# EAGLE board aleph-int130808 (EAGLE 6.4)
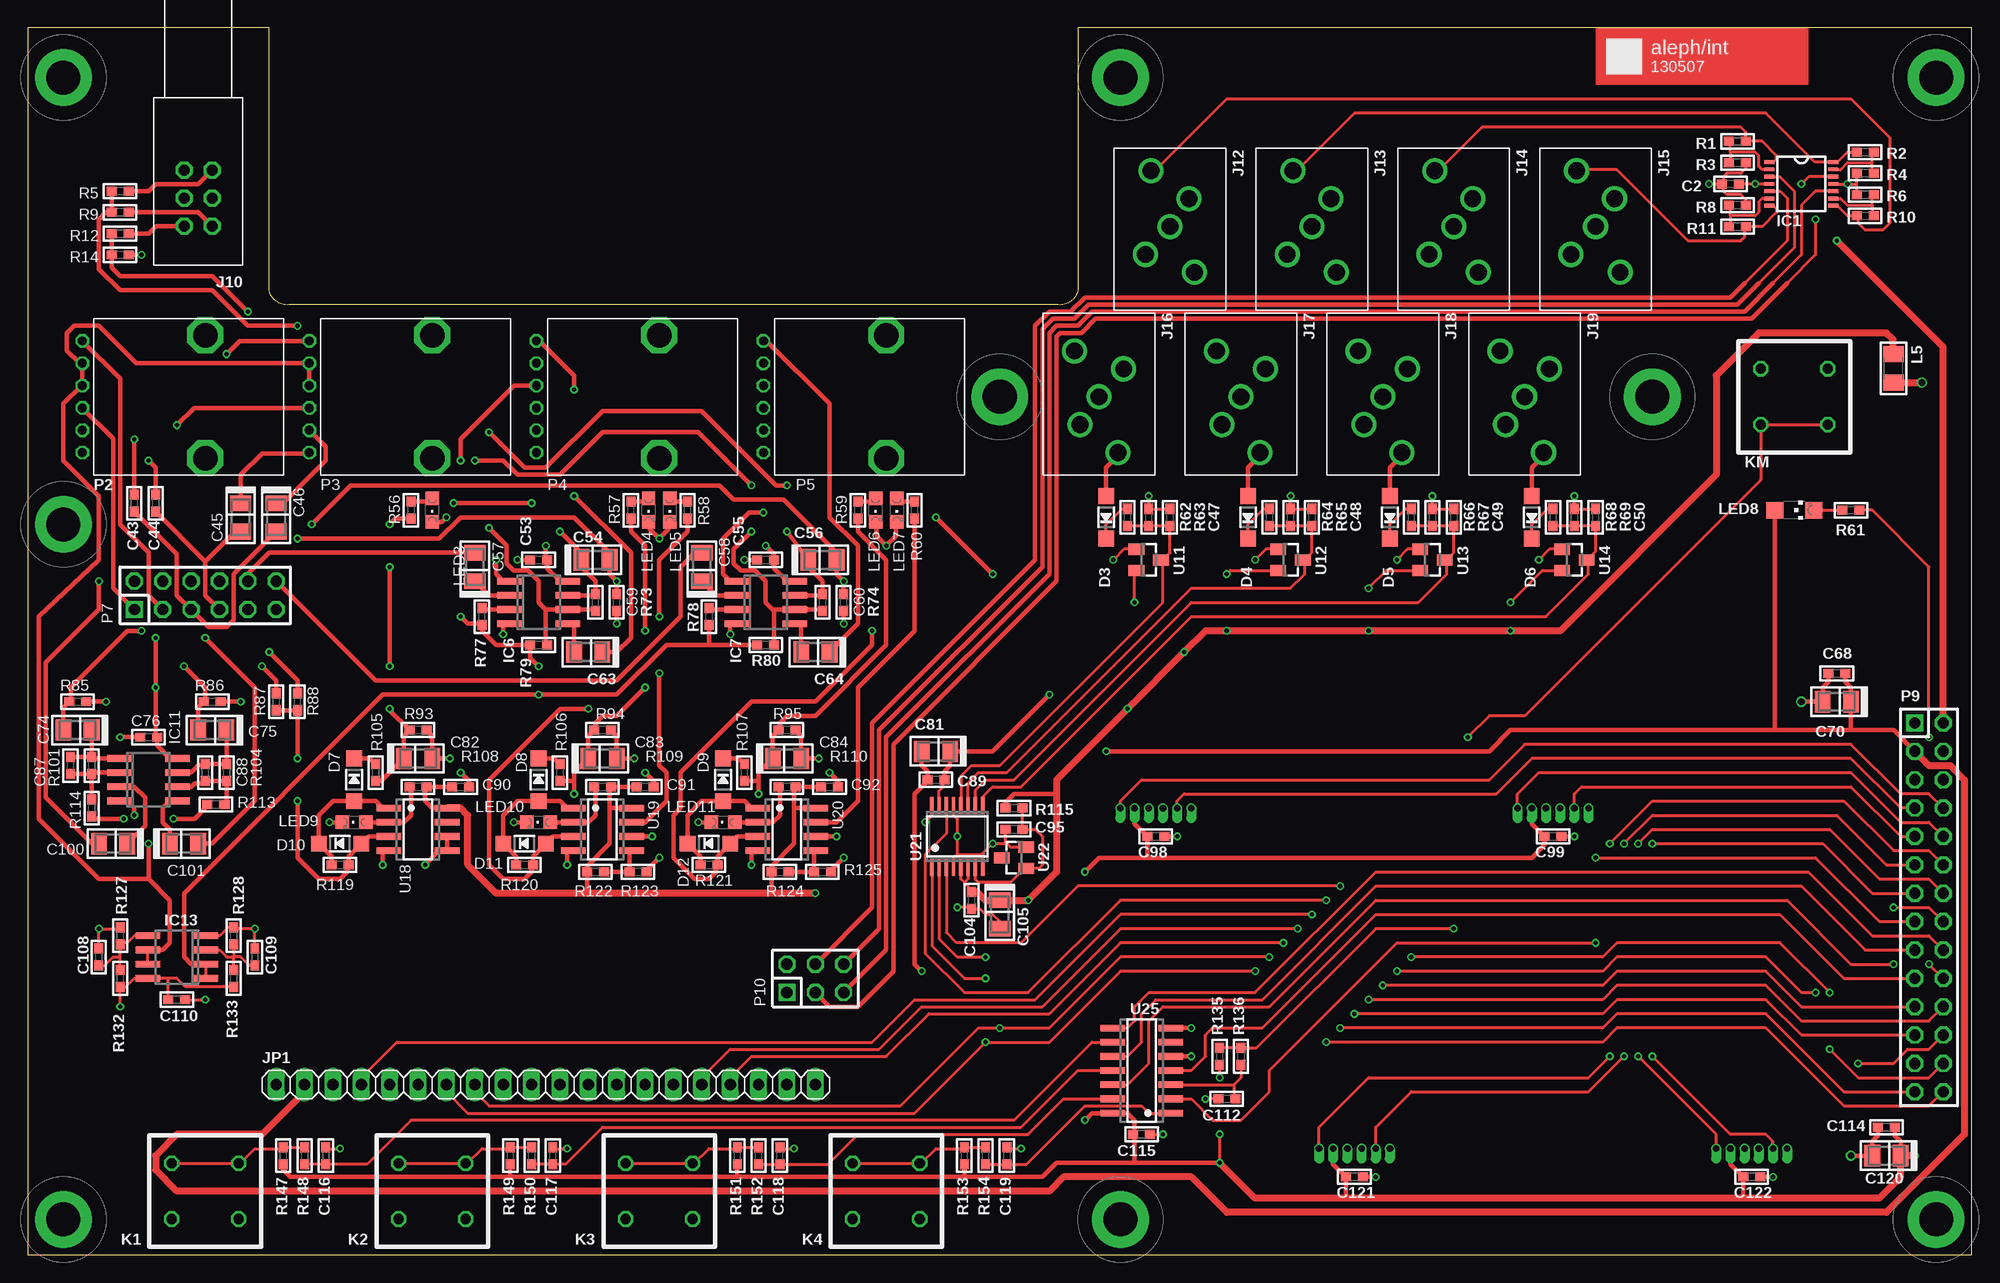
[diagram p0: board, top side]
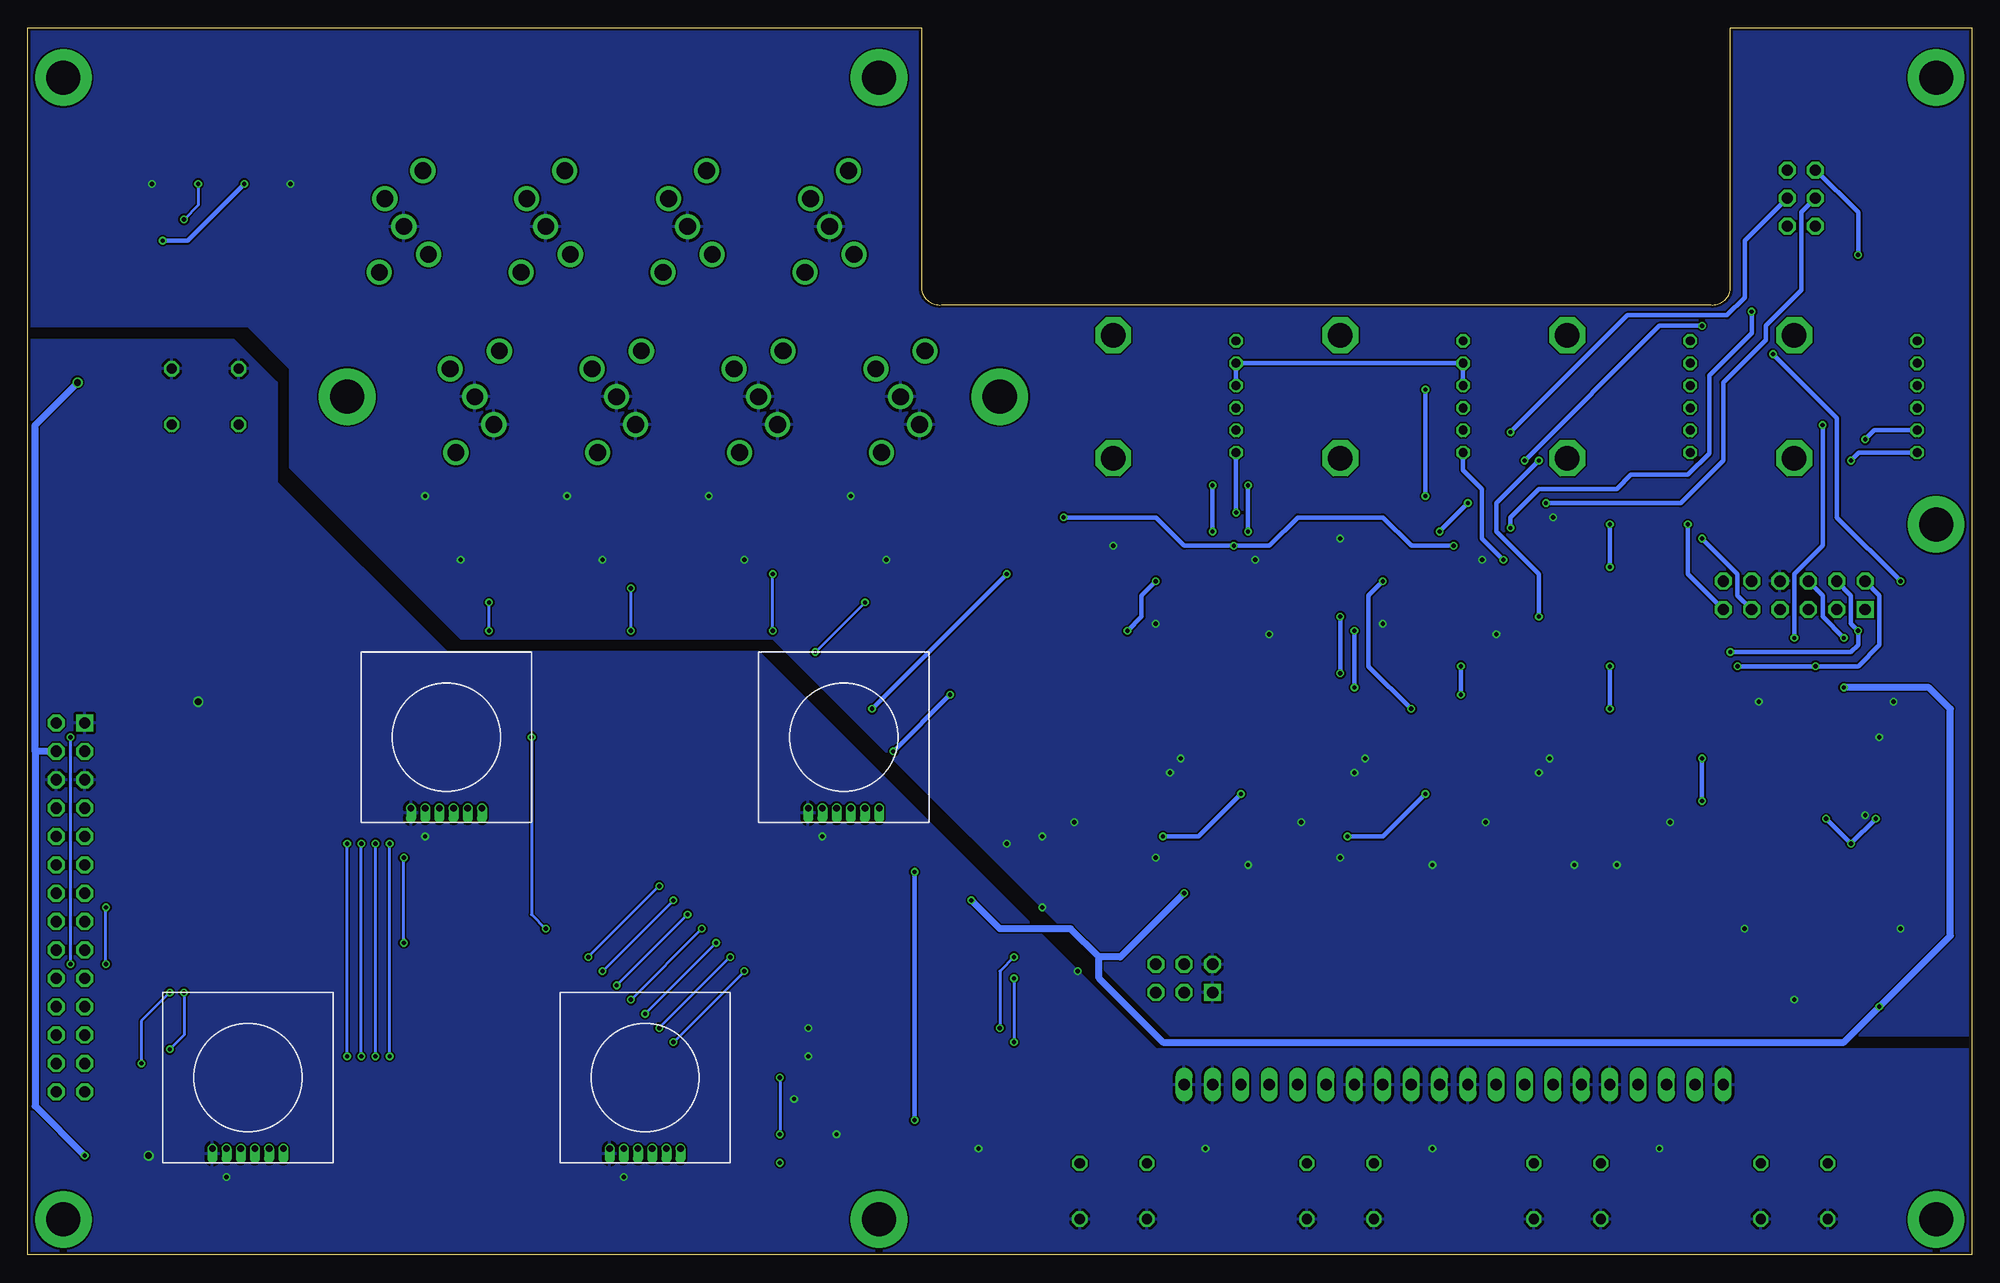
[diagram p1: board, bottom side, seen from below]

Size 173.99 x 109.86 mm. Coordinates in mm from the lower left corner, seen from the top.
Outline: 0,0 173.99,0 173.99,109.86 93.98,109.86 93.98,86.36 arc-90 92.08,85.09 23.5,85.09 arc-90 21.59,86.36 21.59,109.86 0,109.86 0,0
Copper layers (1*2+3*16): Top 0.035mm / dielectric 1.5mm / power 0.035mm / dielectric 0.15mm / gnd 0.035mm / dielectric 0.2mm / Bottom 0.035mm
Design rules "default *": minimum track width 6mil, minimum drill 15mil, track to track 6mil, track to pad 6mil, pad to pad 6mil, via to via 6mil, smd to smd 6mil, copper to edge 10mil, drill to drill 8mil, minimum pad ring 6mil, minimum via ring 6mil, stop-mask expansion 4mil, vias tented up to drill 0mil, thermal gap 10mil

## Footprints (pad centres in the part's own frame; a part is rotated, then mirrored left to right if it is on the bottom)
C0603 = smd 0.9 x 0.8: 1 -0.762,0; 2 0.762,0
C1206/T = smd 1.4 x 1.9: + 1.27,0; - -1.27,0
SOD123 = smd 1.4 x 1.4: A 1.905,0; C -1.905,0
BOURNS-EM14 = drill 0.6 pad 0.813 offset: P$1 -3.175,-6.35; P$2 -1.905,-6.35; P$3 -0.635,-6.35; P$4 0.635,-6.35; P$5 1.905,-6.35; P$6 3.175,-6.35
120-PAD-NS = drill 3.048 pad 5.08: B120 0,0
TSSOP14 = smd 0.9 x 0.35: 1 -2.875,1.95; 2 -2.875,1.3; 3 -2.875,0.65; 4 -2.875,0; 5 -2.875,-0.65; 6 -2.875,-1.3; 7 -2.875,-1.95; 8 2.875,-1.95; 9 2.875,-1.3; 10 2.875,-0.65; 11 2.875,0; 12 2.875,0.65; 13 2.875,1.3; 14 2.875,1.95
SO8 = smd 0.6 x 2.2: 1 -1.905,-2.6; 2 -0.635,-2.6; 3 0.635,-2.6; 4 1.905,-2.6; 5 1.905,2.6; 6 0.635,2.6; 7 -0.635,2.6; 8 -1.905,2.6
PHA2U = drill 1 octagon: 0 -1.25,0; 1 -1.25,-2.5; 2 -1.25,2.5; _0 1.25,0; _1 1.25,-2.5; _2 1.25,2.5
STX-3680 = drill 1.5: 1 2.2,-4.1; 2 -2.2,-2.5; 3 1.7,2.5; 4 -1.7,5; 5 0,0
1X20 = drill 1.016 long: 1 -24.13,0; 2 -21.59,0; 3 -19.05,0; 4 -16.51,0; 5 -13.97,0; 6 -11.43,0; 7 -8.89,0; 8 -6.35,0; 9 -3.81,0; 10 -1.27,0; 11 1.27,0; 12 3.81,0; 13 6.35,0; 14 8.89,0; 15 11.43,0; 16 13.97,0; 17 16.51,0; 18 19.05,0; 19 21.59,0; 20 24.13,0
PVA1 = drill 0.9 octagon: 1 -3,-2.5; 2 -3,2.5; 3 3,2.5; 4 3,-2.5
L1206 = smd 1.4 x 1.8: 1 -1.27,0; 2 1.27,0
CHIPLED_0805 = smd 1.2 x 1.2: A 0,-1.05; C 0,1.05
CHIPLED_1206 = smd 1.5 x 1.5: A 0,-1.75; C 0,1.75
EVJ-POT = drill 0.8 octagon: 1 -5,-11; 2 -3,-11; 3 -1,-11; 4 1,-11; 5 3,-11; 6 5,-11 | drill 2.2 octagon: M1 -5.5,0; M2 5.5,0
DIL-100-2X06 = drill 1.016 square: 1 -6.35,-1.27 | drill 1.016 octagon: 2 -6.35,1.27; 3 -3.81,-1.27; 4 -3.81,1.27; 5 -1.27,-1.27; 6 -1.27,1.27; 7 1.27,-1.27; 8 1.27,1.27; 9 3.81,-1.27; 10 3.81,1.27; 11 6.35,-1.27; 12 6.35,1.27
DIL-100-2X14 = drill 1.016 square: 1 -16.51,-1.27 | drill 1.016 octagon: 2 -16.51,1.27; 3 -13.97,-1.27; 4 -13.97,1.27; 5 -11.43,-1.27; 6 -11.43,1.27; 7 -8.89,-1.27; 8 -8.89,1.27; 9 -6.35,-1.27; 10 -6.35,1.27; 11 -3.81,-1.27; 12 -3.81,1.27; 13 -1.27,-1.27; 14 -1.27,1.27; 15 1.27,-1.27; 16 1.27,1.27; 17 3.81,-1.27; 18 3.81,1.27; 19 6.35,-1.27; 20 6.35,1.27; 21 8.89,-1.27; 22 8.89,1.27; 23 11.43,-1.27; 24 11.43,1.27; 25 13.97,-1.27; 26 13.97,1.27; 27 16.51,-1.27; 28 16.51,1.27
DIL-100-2X03 = drill 1.016 square: 1 -2.54,-1.27 | drill 1.016 octagon: 2 -2.54,1.27; 3 0,-1.27; 4 0,1.27; 5 2.54,-1.27; 6 2.54,1.27
R0603 = smd 0.9 x 0.8: 1 -0.762,0; 2 0.762,0
SOT23 = smd 1 x 1.4: 1 -0.95,-1.1; 2 0.95,-1.1; 3 0,1.1
SO08 = smd 0.6 x 2.2: 1 -1.905,-2.6; 2 -0.635,-2.6; 3 0.635,-2.6; 4 1.905,-2.6; 5 1.905,2.6; 6 0.635,2.6; 7 -0.635,2.6; 8 -1.905,2.6
TSSOP16 = smd 0.3 x 1.5: 1 -2.275,-2.8; 2 -1.625,-2.8; 3 -0.975,-2.8; 4 -0.325,-2.8; 5 0.325,-2.8; 6 0.975,-2.8; 7 1.625,-2.8; 8 2.275,-2.8; 9 2.275,2.8; 10 1.625,2.8; 11 0.975,2.8; 12 0.325,2.8; 13 -0.325,2.8; 14 -0.975,2.8; 15 -1.625,2.8; 16 -2.275,2.8
SO14 = smd 0.6 x 2.2: 1 -3.81,-2.6; 2 -2.54,-2.6; 3 -1.27,-2.6; 4 0,-2.6; 5 1.27,-2.6; 6 2.54,-2.6; 7 3.81,-2.6; 8 3.81,2.6; 9 2.54,2.6; 10 1.27,2.6; 11 0,2.6; 12 -1.27,2.6; 13 -2.54,2.6; 14 -3.81,2.6

## Placement (x,y rotation side)
C2  100n  [C0603]  152.4,95.89 180 top
C43  1u  [C0603]  9.53,67.31 270 top
C44  1u  [C0603]  11.43,67.31 270 top
C45  10u  [C1206/T]  19.05,66.04 90 top
C46  10u  [C1206/T]  22.23,66.04 90 top
C47  10n  [C0603]  102.23,66.04 90 top
C48  10n  [C0603]  114.94,66.04 90 top
C49  10n  [C0603]  127.64,66.04 90 top
C50  10n  [C0603]  140.34,66.04 90 top
C53  100n  [C0603]  45.72,62.23 0 top
C54  10u  [C1206/T]  50.8,62.23 180 top
C55  100n  [C0603]  66.04,62.23 0 top
C56  10u  [C1206/T]  71.12,62.23 180 top
C57  10u  [C1206/T]  40.01,61.59 270 top
C58  10u  [C1206/T]  60.33,61.59 270 top
C59  100p  [C0603]  50.8,58.42 270 top
C60  100p  [C0603]  71.12,58.42 270 top
C63  10u  [C1206/T]  50.16,53.98 0 top
C64  10u  [C1206/T]  70.48,53.98 0 top
C68  100n  [C0603]  161.93,52.07 0 top
C70  10u  [C1206/T]  161.93,49.53 0 top
C74  10u  [C1206/T]  4.45,46.99 0 top
C75  10u  [C1206/T]  16.51,46.99 0 top
C76  100n  [C0603]  10.79,46.35 0 top
C81  10u  [C1206/T]  81.28,45.09 0 top
C82  10u  [C1206/T]  34.92,44.45 180 top
C83  10u  [C1206/T]  51.44,44.45 180 top
C84  10u  [C1206/T]  67.94,44.45 180 top
C87  100p  [C0603]  3.81,43.81 90 top
C88  100p  [C0603]  15.88,43.18 90 top
C89  100n  [C0603]  81.28,42.55 0 top
C90  100n  [C0603]  38.73,41.91 180 top
C91  100n  [C0603]  55.24,41.91 180 top
C92  100n  [C0603]  71.75,41.91 180 top
C95  100n  [C0603]  88.27,38.1 0 top
C98  100n  [C0603]  100.97,37.47 180 top
C99  100n  [C0603]  136.53,37.47 180 top
C100  10u  [C1206/T]  7.62,36.83 0 top
C101  10u  [C1206/T]  13.97,36.83 180 top
C104  100n  [C0603]  84.45,31.75 90 top
C105  10u  [C1206/T]  87,30.48 90 top
C108  100n  [C0603]  6.35,26.67 270 top
C109  100n  [C0603]  20.32,26.67 270 top
C110  100n  [C0603]  13.34,22.86 180 top
C112  1u  [C0603]  107.31,13.97 0 top
C114  100n  [C0603]  166.37,11.43 0 top
C115  100n  [C0603]  99.69,10.79 180 top
C116  1u  [C0603]  26.67,8.89 270 top
C117  1u  [C0603]  46.99,8.89 270 top
C118  1u  [C0603]  67.31,8.89 270 top
C119  1u  [C0603]  87.63,8.89 270 top
C120  10u  [C1206/T]  166.37,8.89 0 top
C121  100n  [C0603]  118.75,6.99 180 top
C122  100n  [C0603]  154.31,6.99 180 top
D3  1N4148W-7  [SOD123]  96.52,66.04 90 top
D4  1N4148W-7  [SOD123]  109.22,66.04 90 top
D5  1N4148W-7  [SOD123]  121.92,66.04 90 top
D6  1N4148W-7  [SOD123]  134.62,66.04 90 top
D7  1N4148W-7  [SOD123]  29.21,42.55 270 top
D8  1N4148W-7  [SOD123]  45.72,42.55 270 top
D9  1N4148W-7  [SOD123]  62.23,42.55 270 top
D10  1N4148W-7  [SOD123]  27.94,36.83 0 top
D11  1N4148W-7  [SOD123]  44.45,36.83 0 top
D12  1N4148W-7  [SOD123]  60.96,36.83 0 top
E1  BOURNS-EM14  [BOURNS-EM14]  154.31,15.88 0 bottom
E2  BOURNS-EM14  [BOURNS-EM14]  118.75,15.88 0 bottom
E3  BOURNS-EM14  [BOURNS-EM14]  100.97,46.35 0 bottom
E4  BOURNS-EM14  [BOURNS-EM14]  136.53,46.36 0 bottom
H4  MOUNT440  [120-PAD-NS]  3.17,105.41 0 top
H5  MOUNT440  [120-PAD-NS]  97.79,105.41 0 top
H6  MOUNT440  [120-PAD-NS]  170.81,105.41 0 top
H7  MOUNT440  [120-PAD-NS]  87,76.83 0 top
H8  MOUNT440  [120-PAD-NS]  145.41,76.83 0 top
H9  MOUNT440  [120-PAD-NS]  3.17,65.41 0 top
H13  MOUNT440  [120-PAD-NS]  3.17,3.17 0 top
H14  MOUNT440  [120-PAD-NS]  97.79,3.17 0 top
H15  MOUNT440  [120-PAD-NS]  170.81,3.17 0 top
IC1  AD8567  [TSSOP14]  158.75,95.89 0 top
IC6  AD8607R  [SO8]  45.72,58.42 270 top
IC7  AD8607R  [SO8]  66.04,58.42 270 top
IC11  AD8607R  [SO8]  10.79,42.55 270 top
IC13  AD8607R  [SO8]  13.34,26.67 90 top
J10  PHA2U  [PHA2U]  15.24,94.61 180 top
J12  STX-3680  [STX-3680]  102.23,92.08 0 top
J13  STX-3680  [STX-3680]  114.94,92.08 0 top
J14  STX-3680  [STX-3680]  127.64,92.08 0 top
J15  STX-3680  [STX-3680]  140.34,92.08 0 top
J16  STX-3680  [STX-3680]  95.89,76.83 180 top
J17  STX-3680  [STX-3680]  108.58,76.83 180 top
J18  STX-3680  [STX-3680]  121.28,76.83 180 top
J19  STX-3680  [STX-3680]  133.99,76.83 180 top
JP1  OLED  [1X20]  46.35,15.24 0 top
K1  PVA1  [PVA1]  15.88,5.71 180 top
K2  PVA1  [PVA1]  36.2,5.71 180 top
K3  PVA1  [PVA1]  56.52,5.71 180 top
K4  PVA1  [PVA1]  76.83,5.71 180 top
KM  PVA1  [PVA1]  158.12,76.83 0 top
L5  600  [L1206]  167,79.38 270 top
LED3  [CHIPLED_0805]  36.2,66.67 180 top
LED4  [CHIPLED_0805]  55.56,66.67 180 top
LED5  [CHIPLED_0805]  57.47,66.67 180 top
LED6  [CHIPLED_0805]  75.88,66.67 180 top
LED7  [CHIPLED_0805]  77.79,66.67 180 top
LED8  [CHIPLED_1206]  158.12,66.67 270 top
LED9  [CHIPLED_0805]  29.21,38.73 90 top
LED10  [CHIPLED_0805]  45.72,38.73 90 top
LED11  [CHIPLED_0805]  62.23,38.73 90 top
P2  EVJ-POT  [EVJ-POT]  15.88,76.83 270 top
P3  EVJ-POT  [EVJ-POT]  36.2,76.83 270 top
P4  EVJ-POT  [EVJ-POT]  56.52,76.83 270 top
P5  EVJ-POT  [EVJ-POT]  76.83,76.83 270 top
P7  M-2X06-DIL-100  [DIL-100-2X06]  15.88,59.05 0 top
P9  M-2X14-DIL-100  [DIL-100-2X14]  170.18,31.11 270 top
P10  M-2X03-DIL-100  [DIL-100-2X03]  70.48,24.77 0 top
R1  10k  [R0603]  153.03,99.69 180 top
R2  10k  [R0603]  164.47,98.74 0 top
R3  10k  [R0603]  153.03,97.79 0 top
R4  10k  [R0603]  164.47,96.84 180 top
R5  10k  [R0603]  8.26,95.25 0 top
R6  10k  [R0603]  164.47,94.93 180 top
R8  10k  [R0603]  153.03,93.98 0 top
R9  47k  [R0603]  8.26,93.34 0 top
R10  10k  [R0603]  164.47,93.03 0 top
R11  10k  [R0603]  153.03,92.08 180 top
R12  47k  [R0603]  8.26,91.44 0 top
R14  10k  [R0603]  8.26,89.53 0 top
R56  270  [R0603]  34.29,66.67 90 top
R57  270  [R0603]  53.98,66.67 90 top
R58  270  [R0603]  59.05,66.67 90 top
R59  270  [R0603]  74.3,66.67 90 top
R60  270  [R0603]  79.38,66.67 90 top
R61  150  [R0603]  163.19,66.67 180 top
R62  10k  [R0603]  98.42,66.04 90 top
R63  10k  [R0603]  100.33,66.04 90 top
R64  10k  [R0603]  111.12,66.04 90 top
R65  10k  [R0603]  113.03,66.04 90 top
R66  10k  [R0603]  123.83,66.04 90 top
R67  10k  [R0603]  125.73,66.04 90 top
R68  10k  [R0603]  136.53,66.04 90 top
R69  10k  [R0603]  138.43,66.04 90 top
R73  100k  [R0603]  52.7,58.42 90 top
R74  100k  [R0603]  73.03,58.42 90 top
R77  470k  [R0603]  40.64,57.15 90 top
R78  470k  [R0603]  60.96,57.15 90 top
R79  4k7  [R0603]  45.72,54.61 0 top
R80  4k7  [R0603]  66.04,54.61 0 top
R85  100k  [R0603]  4.45,49.53 180 top
R86  100k  [R0603]  16.51,49.53 180 top
R87  1k  [R0603]  22.23,49.53 90 top
R88  1k  [R0603]  24.13,49.53 90 top
R93  10k  [R0603]  34.92,46.99 0 top
R94  10k  [R0603]  51.44,46.99 0 top
R95  10k  [R0603]  67.94,46.99 0 top
R101  10k  [R0603]  5.71,43.81 90 top
R104  10k  [R0603]  17.78,43.18 90 top
R105  270  [R0603]  31.11,43.18 90 top
R106  270  [R0603]  47.62,43.18 90 top
R107  270  [R0603]  64.14,43.18 90 top
R108  10k  [R0603]  34.92,41.91 0 top
R109  10k  [R0603]  51.44,41.91 0 top
R110  10k  [R0603]  67.94,41.91 0 top
R113  4k7  [R0603]  16.83,40.32 0 top
R114  4k7  [R0603]  5.71,40.01 90 top
R115  1k  [R0603]  88.27,40.01 0 top
R119  470k  [R0603]  27.94,34.92 0 top
R120  470k  [R0603]  44.45,34.92 0 top
R121  470k  [R0603]  60.96,34.92 0 top
R122  56k  [R0603]  50.8,34.29 0 top
R123  100k  [R0603]  54.61,34.29 0 top
R124  56k  [R0603]  67.31,34.29 0 top
R125  100k  [R0603]  71.12,34.29 0 top
R127  100k  [R0603]  8.26,28.57 270 top
R128  100k  [R0603]  18.41,28.57 270 top
R132  100k  [R0603]  8.26,24.77 270 top
R133  100k  [R0603]  18.41,24.77 270 top
R135  82k  [R0603]  106.68,17.78 90 top
R136  18k  [R0603]  108.58,17.78 90 top
R147  82k  [R0603]  22.86,8.89 90 top
R148  18k  [R0603]  24.77,8.89 270 top
R149  82k  [R0603]  43.18,8.89 90 top
R150  18k  [R0603]  45.09,8.89 270 top
R151  82k  [R0603]  63.5,8.89 90 top
R152  18k  [R0603]  65.41,8.89 90 top
R153  82k  [R0603]  83.82,8.89 90 top
R154  18k  [R0603]  85.72,8.89 90 top
REF-OLED  NHD-2.7  [NHD-2.7]  46.35,15.24 180 top
U11  BAS70-04  [SOT23]  100.33,62.23 270 top
U12  BAS70-04  [SOT23]  113.03,62.23 270 top
U13  BAS70-04  [SOT23]  125.73,62.23 270 top
U14  BAS70-04  [SOT23]  138.43,62.23 270 top
U18  TL072D  [SO08]  34.92,38.1 270 top
U19  TL072D  [SO08]  51.44,38.1 270 top
U20  TL072D  [SO08]  67.94,38.1 270 top
U21  AD7923  [TSSOP16]  83.19,37.47 0 top
U22  LM4040M3  [SOT23]  88.27,35.56 90 top
U25  74HC14D  [SO14]  99.69,16.51 90 top

## Library data of the parts
C2 C43-C50 C53-C60 C63 C64 C68 C70 C74-C76 C81-C84 C87-C92 C95 C98-C101 C104 C105 C108-C110 C112 C114-C122 L5 R1-R6 R8-R12 R14 R56-R69 R73 R74 R77-R80 R85-R88 R93-R95 R101 R104-R110 R113-R115 R119-R125 R127 R128 R132 R133 R135 R136 R147-R154 = rc-master-smd
D3-D12 U11-U14 U22 = diode
E1-E4 J10 J12-J19 K1-K4 KM P2-P5 REF-OLED U21 = monome-inc
H4-H9 H13-H15 = monome-inc; BOM: EXCLUDE
IC1 = analog-devices; MPN: AD8544ARUZ; OC_FARNELL: unknown; OC_NEWARK: 15P1001
IC6 IC7 IC11 IC13 = analog-devices; MPN: AD8607ARMZ-R2; OC_FARNELL: 1651293; OC_NEWARK: 19M8927
JP1 = pinhead
LED3-LED11 = led
P7 P9 P10 = con-headers-jp
U18-U20 = linear
U25 = 74xx-us

## Nets
+3V3: C68.2 C70.+ C81.+ C89.2 JP1.2 LED8.A P9.3 U21.15
+5V: C98.2 C99.2 C114.2 C115.2 C120.+ C121.2 C122.2 E1.P$5 E2.P$5 E3.P$5 E4.P$5 L5.2 P9.4 R135.1 R147.1 R149.1 R151.1 R153.1 U25.14
+5VA: C53.2 C55.2 C76.2 C90.2 C91.2 C92.2 C104.2 C105.+ C110.2 IC6.8 IC7.8 IC11.8 IC13.8 L5.1 P7.6 R108.2 R109.2 R110.2 R115.1 R122.1 R124.1 R132.2 R133.2 U11.2 U12.2 U13.2 U14.2 U18.8 U19.8 U20.8 U21.5 U21.6
+12V: C2.1 IC1.4 P9.2
AGND: C2.2 C47.2 C48.2 C49.2 C50.2 C53.1 C55.1 C76.1 C82.- C83.- C84.- C90.1 C91.1 C92.1 C95.1 C104.1 C105.- C108.1 C109.1 C110.1 IC1.11 IC6.4 IC7.4 IC11.4 IC13.4 J12.5 J13.5 J14.5 J15.5 J16.3 J16.5 J17.3 J17.5 J18.3 J18.5 J19.3 J19.5 LED3.C LED4.C LED5.C LED6.C LED7.C LED9.C LED10.C LED11.C P7.8 P10.1 P10.2 R3.2 R4.2 R6.2 R8.2 R63.2 R65.2 R67.2 R69.2 R73.1 R74.1 R85.1 R86.1 R93.2 R94.2 R95.2 R123.2 R125.2 R127.1 R128.1 U11.1 U12.1 U13.1 U14.1 U18.4 U18.5 U18.6 U19.4 U20.4 U21.4 U21.8 U21.13 U21.16 U22.2
CVOUT1^: IC1.3 P10.6
CVOUT2^: IC1.5 P10.4
CVOUT3^: IC1.10 P10.5
CVOUT4^: IC1.12 P10.3
ENC0A^: E1.P$2 P9.13
ENC0B^: E1.P$6 P9.14
ENC1A^: E2.P$2 P9.11
ENC1B^: E2.P$6 P9.12
ENC2A^: E4.P$2 P9.9
ENC2B^: E4.P$6 P9.10
ENC3A^: E3.P$2 P9.7
ENC3B^: E3.P$6 P9.8
GAINL-1: C54.+ C59.1 IC6.7 J10._0
GAINL-2: C59.2 IC6.6 R12.1 R14.1 R79.2
GAINR-1: C56.+ C60.1 IC7.7 J10.0
GAINR-2: C60.2 IC7.6 R5.1 R9.1 R80.2
GND: C68.1 C70.- C81.- C89.1 C98.1 C99.1 C112.1 C114.1 C115.1 C116.1 C117.1 C118.1 C119.1 C120.- C121.1 C122.1 E1.P$1 E2.P$1 E3.P$1 E4.P$1 JP1.1 JP1.5 JP1.6 JP1.10 JP1.11 JP1.12 JP1.13 JP1.14 JP1.19 JP1.20 K1.2 K1.3 K2.2 K2.3 K3.2 K3.3 K4.2 K4.3 KM.2 KM.3 P9.1 P9.5 P9.6 U25.5 U25.7
HPL^: P2.4 P7.1
HPR^: P2.1 P7.3
IN1L-J^: C57.- P7.10
IN1L^: C54.- D11.A P7.9 R73.2 R120.2 U19.3
IN1R-J^: C58.- P7.12
IN1R^: C56.- D12.A P7.11 R74.2 R121.2 U20.3
IN-VREF: IC13.1 IC13.2 P4.2 P4.3 P5.2 P5.3 R77.1 R78.1 R79.1 R80.1
KEY0^: P9.18 U25.8
KEY1^: P9.17 U25.10
KEY2^: P9.16 U25.12
KEY3^: P9.15 U25.2
MODE-KEY^: P9.19 U25.4
MODE-LED^: P9.20 R61.1
N$1: IC1.2 R1.2 R3.1
N$2: K1.1 K1.4 R147.2 R148.1
N$8: C116.2 R148.2 U25.9
N$10: K2.1 K2.4 R149.2 R150.1
N$11: C117.2 R150.2 U25.11
N$20: LED8.C R61.2
N$21: K3.1 K3.4 R151.2 R152.2
N$23: C118.2 R152.1 U25.13
N$27: K4.1 K4.4 R153.2 R154.2
N$30: C119.2 R154.1 U25.1
N$33: C45.+ P3.6
N$34: D3.A J16.4
N$37: D4.C R64.2
N$39: D3.C R62.2
N$40: D5.C R66.2
N$41: C46.+ P3.5
N$42: D4.A J17.4
N$43: KM.1 KM.4 R135.2 R136.2
N$46: D6.C R68.2
N$47: C100.- P3.1
N$48: D5.A J18.4
N$49: C112.2 R136.1 U25.3
N$51: C101.+ IC11.5
N$52: D6.A J19.4
N$56: IC1.1 J14.4 R1.1
N$58: C95.2 R115.2 U21.7 U22.1
N$89: C75.+ C88.2 IC11.7 R104.2
N$90: C88.1 IC11.6 R104.1 R113.2
N$91: C101.- P3.4
N$93: C100.+ IC11.3
N$102: C74.+ C87.2 IC11.1 R101.2
N$103: C87.1 IC11.2 R101.1 R114.2
N$116: C48.1 R64.1 R65.1 U12.3 U21.11
N$117: C49.1 R66.1 R67.1 U13.3 U21.10
N$118: C50.1 R68.1 R69.1 U14.3 U21.9
N$119: C47.1 R62.1 R63.1 U11.3 U21.12
N$132: IC1.6 R8.1 R11.2
N$135: IC1.9 R6.1 R10.2
N$136: IC1.13 R2.2 R4.1
N$137: IC1.8 J12.4 R10.1
N$138: IC1.14 J13.4 R2.1
N$139: IC1.7 J15.4 R11.1
N$149: C43.1 P2.5
N$151: C44.1 P2.6
N$152: C109.2 IC13.3 R128.2 R133.1
N$153: IC6.3 R77.2
N$158: IC6.1 P4.6
N$159: C63.- IC6.5
N$162: D8.A D11.C R120.1 U19.1
N$163: C108.2 IC13.5 R127.2 R132.1
N$164: C57.+ IC6.2
N$165: C63.+ P4.1
N$166: D8.C R106.2
N$167: C83.+ R57.1 R94.1 R106.1 U19.6
N$168: LED10.A R109.1 U19.2
N$169: IC7.3 R78.2
N$171: J10._2 R12.2
N$172: IC7.1 P5.6
N$173: LED4.A R57.2
N$174: LED5.A R58.2
N$175: J10._1 R14.2
N$176: J10.2 R9.2
N$177: J10.1 R5.2
N$178: R58.1 U19.7
N$179: R122.2 R123.1 U19.5
N$180: C64.- IC7.5
N$181: C58.+ IC7.2
N$182: C64.+ P5.1
N$184: D9.A D12.C R121.1 U20.1
N$185: D9.C R107.2
N$186: C84.+ R59.1 R95.1 R107.1 U20.6
N$187: LED11.A R110.1 U20.2
N$188: LED6.A R59.2
N$189: LED7.A R60.2
N$190: R60.1 U20.7
N$191: R124.2 R125.1 U20.5
N$195: D10.A R87.1 R88.1 R119.2 U18.3
N$196: D7.A D10.C R119.1 U18.1
N$197: D7.C R105.2
N$198: C82.+ R56.1 R93.1 R105.1
N$199: LED9.A R108.1 U18.2
N$200: LED3.A R56.2
OLED-DC^: JP1.4 P9.21
OLED-RES^: JP1.16 P9.22
OUT1L-J^: C75.- P7.2 R86.2 R87.2
OUT1L^: C43.2 C46.- P7.5
OUT1R-J^: C74.- P7.4 R85.2 R88.2
OUT1R^: C44.2 C45.- P7.7
OUT-VREF: IC13.6 IC13.7 P2.2 P2.3 P3.2 P3.3 R113.1 R114.1
SPI1-CS0^: JP1.17 P9.23
SPI1-CS1^: P9.24 U21.3
SPI1-MISO^: P9.26 U21.14
SPI1-MOSI^: JP1.8 P9.27 U21.2
SPI1-SCK^: JP1.7 P9.28 U21.1

## Tracks (layer width: path | path; a pad name or v marks a point on that pad's centre or on a via)
+3V3  (via drill 0.38)
  Top 0.254: 156.37,66.83 LED8.A | U21.15 81.56,41.55 81.92,41.91 81.92,42.42 C89.2
  Top 0.406: C89.2 82.04,43.31 82.55,43.81 C81.+ 86.36,45.09 v91.44,50.16 | C68.2 162.69,51.31 163.19,50.8 C70.+ 163.19,46.99 | v96.52,45.09 130.81,45.09 132.72,46.99 156.21,46.99 | P9.3 167,46.99 163.19,46.99 | 163.19,46.99 156.21,46.99 | LED8.A 156.37,47.15 156.21,46.99
  Top 0.61: JP1.2 24.77,14.61 20.95,10.79 13.34,10.79 11.43,8.89 11.43,7.62 13.34,5.71 91.44,5.71 92.71,6.99 104.14,6.99 107.31,3.81 166.37,3.81 173.35,10.79 173.35,42.55 172.09,43.81 170.18,43.81 P9.3
  Bottom 0.406: v91.44,50.16 v96.52,45.09
+5V  (via drill 0.38, 0.6)
  Top 0.254: 99.06,10.92 C115.2 | R135.1 v106.68,15.88 | v106.68,10.79 v106.68,8.26
  Top 0.406: C120.+ 167.64,10.16 167.13,10.67 C114.2 | 63.5,6.99 83.82,6.99 | 83.82,6.99 90.81,6.99 92.08,8.26 99.06,8.26 | 99.06,8.26 v106.68,8.26 | 63.5,6.99 43.18,6.99 | 43.18,6.99 23.5,6.99 22.86,7.62 R147.1 | 43.18,6.99 R149.1 | R151.1 63.5,6.99 | 83.82,6.99 R153.1 | E3.P$5 99.06,38.61 C98.2 100.2,35.69 100.33,35.56 | E4.P$5 134.62,38.61 C99.2 135.76,36.7 134.62,35.56 100.33,35.56 | E1.P$5 152.4,8.13 C122.2 153.54,5.21 153.67,5.08 | E2.P$5 116.84,8.13 C121.2 117.98,5.21 118.11,5.08 | 100.33,35.56 95.89,35.56 v94.61,34.29 | v94.61,12.06 95.25,12.7 U25.14 98.42,12.7 99.06,12.06 99.06,10.92 99.06,8.26
  Top 0.61: L5.2 v169.54,78.11 | v106.68,8.26 109.86,5.08 118.11,5.08 153.67,5.08 165.74,5.08 167.64,6.99 C120.+ v168.91,8.89
  Bottom 0.254: v106.68,15.88 v106.68,10.79
  Bottom 0.406: v94.61,12.06 v94.61,34.29
  Bottom 0.61: 173.35,45.09 173.35,13.34 v168.91,8.89 | P9.4 173.35,45.09 | 173.35,45.09 173.35,74.3 v169.54,78.11
+5VA  (via drill 0.38)
  Top 0.254: U21.5 83.51,33.65 83.82,33.34 | C104.2 84.45,32.7 83.82,33.34 | U21.6 84.16,33.68 83.82,33.34 | U13.2 121.6,61.28 v120.02,59.69 | U12.2 107.63,61.28 v107.31,60.96 | U14.2 135.57,61.28 v132.72,58.42 | v99.06,58.42 99.06,61.11 U11.2 | R133.2 14.1,24 13.34,24.77 12.57,24.77 | 12.57,24.77 IC13.8 9.53,24.77 8.76,24 R132.2 v8.26,22.23 | C110.2 12.57,24.77
  Top 0.406: R115.1 87.5,40.51 88.27,41.27 92.08,41.27 | 166.94,80.71 L5.1 | IC11.8 12.7,44.45 11.56,45.59 C76.2 11.43,46.48 v11.43,50.8 v11.43,55.24 | IC6.8 47.62,60.33 46.48,61.47 C53.2 46.35,62.36 v46.35,63.5 | C91.2 R109.2 52.07,41.78 52.07,40.01 | 52.07,40.01 52.07,36.83 50.04,34.8 R122.1 50.04,32.51 50.16,32.38 | U19.8 52.07,40.01 | IC7.8 67.94,60.33 66.8,61.47 C55.2 66.8,62.74 v66.04,63.5 | C92.2 R110.2 68.58,41.78 68.58,40.01 | 68.58,40.01 68.58,36.83 66.55,34.8 R124.1 66.55,32.51 66.67,32.38 | U20.8 68.58,40.01 | C90.2 R108.2 35.56,41.78 35.56,40.64 36.2,40.01 U18.8 | v81.28,66.04 v86.36,60.96
  Top 0.61: C104.2 84.96,32.51 85.72,31.75 C105.+ v89.53,31.75 92.08,34.29 92.08,41.27 92.08,42.55 v98.42,48.9 v103.5,53.98 105.41,55.88 v107.31,55.88 v120.02,55.88 v132.72,55.88 137.16,55.88 151.13,69.85 151.13,78.74 154.94,82.55 166.37,82.55 166.94,81.98 166.94,80.71 | v70.48,32.38 66.67,32.38 50.16,32.38 41.91,32.38 39.37,34.92 39.37,39.37 38.73,40.01 U18.8
  Bottom 0.254: v107.31,55.88 v107.31,60.96 | v120.02,55.88 v120.02,59.69 | v132.72,55.88 v132.72,58.42 | v103.5,53.98 v99.06,58.42
  Bottom 0.406: P7.6 13.34,59.05 13.34,57.15 v11.43,55.24 | v46.35,63.5 50.16,63.5 52.7,66.04 60.33,66.04 62.87,63.5 v66.04,63.5 70.48,63.5 73.03,66.04 v81.28,66.04 | v86.36,60.96 v98.42,48.9
  Bottom 0.61: 78.11,26.67 78.11,24.77 72.39,19.05 11.43,19.05 v8.26,22.23 1.91,28.57 1.91,48.9 3.81,50.8 v11.43,50.8 | 78.11,26.67 80.64,29.21 87,29.21 v89.53,31.75 | v70.48,32.38 76.2,26.67 78.11,26.67
+12V  (via drill 0.38)
  Top 0.254: IC1.4 v154.62,95.89 C2.1
  Top 0.61: v161.93,90.81 171.45,81.28 P9.2
  Bottom 0.406: v161.93,90.81 159.7,90.81 v154.62,95.89
AGND  (via drill 0.38)
  Top 0.254: C105.- 87,29.84 86.36,30.48 85.72,30.48 85.22,30.99 C104.1 84.45,31.11 v83.19,31.11 | U21.4 82.86,35.55 83.19,35.88 | 85.46,35.51 U21.8 85.46,35.93 | 83.19,35.88 v83.19,37.47 83.19,39.05 82.86,39.36 U21.13 | 85.46,35.93 v86.36,36.83 87.63,36.83 | U22.2 87.95,36.51 87.63,36.83 | C95.1 87.5,36.96 87.63,36.83 | 83.19,35.88 85.41,35.88 85.46,35.93 | C47.2 R63.2 v100.33,67.94 | U11.1 98.11,63.18 v97.16,62.23 | U12.1 110.81,63.18 v109.86,62.23 | U13.1 123.5,63.18 v122.56,62.23 | v113.03,67.94 R65.2 C48.2 | C49.2 R67.2 v125.73,67.94 | C50.2 R69.2 v138.43,67.94 | U14.1 136.21,63.18 v135.25,62.23 | U21.16 80.91,39.32 v80.33,38.73 | IC1.11 v162.88,95.89 163.7,95.89 | C2.2 v150.5,95.89 | R6.2 163.7,95.89 | 163.7,95.89 R4.2 | R8.2 153.8,94.49 153.35,94.93 152.08,94.93 151.76,95.25 151.76,95.76 C2.2 | R3.2 153.8,97.28 153.35,96.84 152.08,96.84 151.76,96.52 151.76,96.01 C2.2 | C108.1 v6.35,29.21 8.13,29.21 R127.1 | IC13.4 17.14,28.57 17.91,29.34 R128.1 18.54,29.21 v20.32,29.21 C109.1 | C110.1 v15.88,22.86
  Top 0.406: IC11.4 8.89,40.64 9.53,40.01 v9.53,39.37 | C76.1 v8.26,46.35 | R85.1 v6.99,49.53 | R86.1 v19.05,49.53 | IC6.4 42.55,56.52 v42.55,55.56 | C53.1 v43.81,62.23 | R73.1 v52.7,56.52 | U19.4 48.26,36.2 v48.26,34.92 | LED10.C v43.5,38.73 | C91.1 56.01,42.42 v55.24,43.18 | R94.2 52.7,46.48 C83.- v54.29,44.45 | R123.2 55.37,34.42 v56.52,35.56 | IC7.4 62.87,56.52 v62.87,55.56 | C55.1 v64.14,62.23 | R74.1 v73.03,56.52 | U20.4 64.77,36.2 v64.77,34.92 | LED11.C v60.01,38.73 | C92.1 72.52,42.42 v71.75,43.18 | R95.2 69.22,46.48 C84.- v70.8,44.45 | R125.2 71.88,34.42 v73.03,35.56 | U18.4 31.75,36.2 v31.75,34.92 | LED9.C v26.99,38.73 | C90.1 39.5,42.42 v38.73,43.18 | R93.2 36.2,46.48 C82.- v37.78,44.45 | LED4.C 55.66,65.62 55.66,64.99 v56.52,64.14 57.37,64.99 57.37,65.62 LED5.C | LED6.C 75.98,65.62 75.98,64.36 v76.83,63.5 77.69,64.36 77.69,65.62 LED7.C | U18.5 U18.6 37.52,36.26 37.47,36.2 36.83,36.2 v35.56,34.92 | LED3.C 37.05,65.62 v37.47,66.04
  pour Bottom: 93.98,109.86 173.99,109.86 173.99,83.19 154.31,83.19 150.5,79.38 150.5,70.48 135.25,55.24 107.31,55.24 71.75,19.68 0,19.68 0,109.86 21.59,109.86 21.59,86.36 arc90 23.5,85.09 92.08,85.09 arc90 93.98,86.36
CVOUT1^
  Top 0.254: IC1.3 156.83,96.53 158.12,95.25 158.12,90.17 154.94,87
  Top 0.406: 154.94,87 153.03,85.09 94.93,85.09 93.66,83.82 91.76,83.82 90.81,82.87 90.81,61.59 76.2,46.99 76.2,29.21 P10.6
CVOUT2^
  Top 0.254: IC1.5 156.86,95.23 157.48,94.61 157.48,90.81 153.67,87
  Top 0.406: 153.67,87 152.4,85.72 94.61,85.72 93.34,84.45 91.44,84.45 90.17,83.19 90.17,62.23 75.56,47.62 75.56,31.11 P10.4
CVOUT3^
  Top 0.254: IC1.10 160,95.23 158.75,93.98 158.75,89.53 156.21,87
  Top 0.406: 156.21,87 153.67,84.45 95.25,84.45 93.98,83.19 92.08,83.19 91.44,82.55 91.44,60.96 76.83,46.35 76.83,27.3 P10.5
CVOUT4^  (via drill 0.38)
  Top 0.254: IC1.12 159.4,96.53 v158.75,95.89 | v160.02,92.71 160.02,89.53 157.48,87
  Top 0.406: 157.48,87 154.31,83.82 95.57,83.82 94.3,82.55 92.39,82.55 92.08,82.23 92.08,60.33 77.47,45.72 77.47,25.4 74.3,22.23 71.75,22.23 P10.3
  Bottom 0.254: v158.75,95.89 158.75,93.98 v160.02,92.71
ENC0A^  (via drill 0.38)
  Top 0.254: E1.P$2 156.21,10.16 155.57,10.79 152.4,10.79 v145.41,17.78 | v145.41,36.83 160.66,36.83 165.1,32.38 P9.13
  Bottom 0.254: v145.41,17.78 v145.41,36.83
ENC0B^  (via drill 0.38)
  Top 0.254: E1.P$6 151.13,10.79 v144.15,17.78 | v144.15,36.83 145.41,38.1 161.29,38.1 165.74,33.66 170.18,33.66 P9.14
  Bottom 0.254: v144.15,17.78 v144.15,36.83
ENC1A^  (via drill 0.38)
  Top 0.254: E2.P$2 120.65,11.43 123.83,14.61 139.7,14.61 v142.88,17.78 | v142.88,36.83 145.41,39.37 161.93,39.37 166.37,34.92 P9.11
  Bottom 0.254: v142.88,17.78 v142.88,36.83
ENC1B^  (via drill 0.38)
  Top 0.254: E2.P$6 115.57,11.43 120.02,15.88 139.7,15.88 v141.6,17.78 | v141.6,36.83 145.41,40.64 162.56,40.64 167,36.2 170.18,36.2 P9.12
  Bottom 0.254: v141.6,17.78 v141.6,36.83
ENC2A^
  Top 0.254: E4.P$2 138.43,41.27 139.06,41.91 163.19,41.91 167.64,37.47 P9.9
ENC2B^
  Top 0.254: E4.P$6 133.35,41.27 135.25,43.18 163.19,43.18 167.64,38.73 170.18,38.73 P9.10
ENC3A^
  Top 0.254: E3.P$2 102.87,40.64 103.5,41.27 131.44,41.27 134.62,44.45 163.19,44.45 167.64,40.01 P9.7
ENC3B^
  Top 0.254: E3.P$6 97.79,40.64 99.69,42.55 130.81,42.55 133.99,45.72 163.19,45.72 167.64,41.27 170.18,41.27 P9.8
GAINL-1  (via drill 0.38)
  Top 0.406: IC6.7 50.67,59.05 C59.1 50.8,60.33 49.53,61.59 C54.+ 49.53,62.87 v47.62,64.77 | v38.1,67.31 v45.09,67.31
  Bottom 0.406: J10._0 13.99,94.59 15.24,93.34 15.24,86.36 18.41,83.19 18.41,81.92 22.23,78.11 22.23,71.12 26.04,67.31 v38.1,67.31 | v45.09,67.31 v47.62,64.77
GAINL-2  (via drill 0.38)
  Top 0.406: R12.1 R14.1 7.49,88.39 8.26,87.63 16.51,87.63 v19.68,84.45 | C59.2 50.67,57.78 IC6.6 46.35,57.78 | 46.35,57.78 45.72,58.42 45.72,60.33 44.77,61.28 43.5,61.28 42.86,61.91 42.86,63.5 v41.27,65.09 | 46.35,57.78 46.35,54.74 R79.2
  Bottom 0.406: v19.68,84.45 19.68,82.55 23.5,78.74 23.5,71.75 25.4,69.85 30.48,69.85 31.75,68.58 38.73,68.58 41.27,66.04 v41.27,65.09
GAINR-1  (via drill 0.38)
  Top 0.406: IC7.7 70.99,59.05 C60.1 71.12,60.33 69.85,61.59 C56.+ v67.94,64.77 | v41.27,73.66 44.45,70.48 46.35,70.48 51.44,75.56 60.33,75.56 66.99,68.9 v67.94,68.9
  Bottom 0.406: J10.0 16.51,94.61 20.32,90.81 20.32,85.72 21.91,84.14 30.8,84.14 v41.27,73.66 | v67.94,68.9 v67.94,64.77
GAINR-2  (via drill 0.38)
  Top 0.406: R5.1 R9.1 6.99,93.34 6.35,92.71 6.35,88.27 8.26,86.36 16.51,86.36 19.68,83.19 v24.13,83.19 | C60.2 70.99,57.78 IC7.6 66.67,57.78 | v40.01,71.12 42.55,71.12 43.81,69.85 47.62,69.85 51.44,73.66 60.01,73.66 v64.77,68.9 | 66.67,57.78 66.04,58.42 66.04,60.33 65.09,61.28 63.82,61.28 63.18,61.91 63.18,63.18 v64.77,64.77 | R80.2 66.8,57.66 66.67,57.78
  Bottom 0.406: v24.13,83.19 27.94,83.19 v40.01,71.12 | v64.77,64.77 v64.77,68.9
GND  (via drill 0.38, 0.6)
  Top 0.254: C116.1 26.67,9.53 v27.94,9.53 | C117.1 46.99,9.53 v48.26,9.53 | C118.1 67.31,9.53 v68.58,9.53 | C119.1 87.63,9.53 v88.9,9.53 | C115.1 v101.6,10.79 | C112.1 v105.41,13.97
  Top 0.406: C81.- 80.01,43.81 80.52,43.31 C89.1 80.52,42.42 79.38,41.27 79.38,26.04 v80.01,25.4 | C99.1 v138.43,37.47 | C98.1 v102.87,37.47 | C122.1 v156.21,6.99 | C68.1 161.16,51.31 160.66,50.8 C70.- v158.75,49.53 | C114.1 165.61,10.67 165.1,10.16 C120.- v163.19,8.89 | C121.1 v120.65,6.99 | U25.7 v104.14,20.32 | U25.5 v104.14,17.78
  pour Bottom: 0,18.41 0,0 173.99,0 173.99,81.92 155.57,81.92 151.76,78.11 151.76,69.22 136.53,53.98 108.58,53.98 73.03,18.41
HPL^
  Top 0.406: P7.1 7.62,59.69 7.62,73.09 P2.4
HPR^
  Top 0.406: P7.3 10.79,59.05 10.79,62.87 8.26,65.41 8.26,78.45 P2.1
IN1L-J^
  Top 0.406: P7.10 19.68,60.96 21.59,62.87 C57.- 39.37,62.87
IN1L^  (via drill 0.38)
  Top 0.406: U19.3 46.99,37.47 D11.A 45.21,35.69 R120.2 45.09,34.8 45.09,34.29 44.45,33.66 42.55,33.66 41.27,34.92 41.27,42.55 47.62,48.9 v50.16,48.9 | R73.2 v52.7,60.33 52.07,60.96 C54.- 52.07,62.87 48.9,66.04 38.73,66.04 36.83,64.14 v24.13,64.14
  Bottom 0.406: P7.9 20.95,59.05 20.95,60.96 v24.13,64.14 | v52.7,60.33 53.98,59.05 53.98,52.7 v50.16,48.9
IN1R-J^
  Top 0.406: P7.12 31.11,51.44 52.7,51.44 58.42,57.15 58.42,61.59 59.69,62.87 C58.-
IN1R^  (via drill 0.38)
  Top 0.406: R74.2 v73.03,60.33 72.39,60.96 C56.- 72.39,62.87 67.63,67.63 63.18,67.63 61.91,68.9 28.89,68.9 v25.4,65.41 | U20.3 63.5,37.47 D12.A 61.72,35.69 R121.2 61.59,34.8 61.59,34.29 60.96,33.66 59.69,33.66 57.78,35.56 57.78,39.37 58.42,40.01 58.42,43.18 64.77,49.53 70.48,49.53 75.56,54.61 v75.56,55.88
  Bottom 0.406: P7.11 25.4,60.96 v25.4,65.41 | v73.03,60.33 74.3,59.05 74.3,57.15 v75.56,55.88
IN-VREF  (via drill 0.38)
  Top 0.254: IC13.2 IC13.1
  Top 0.406: IC13.2 14.61,26.04 13.97,26.67 13.97,32.38 31.75,50.16 v45.72,50.16 52.7,50.16 57.15,54.61 60.96,54.61 | R78.1 60.96,54.61 | 60.96,54.61 R80.1 | v45.72,52.7 44.96,53.47 R79.1 41.91,54.61 40.64,55.88 R77.1 40.51,56.52 39.37,56.52 v38.73,57.15 | P4.3 43.55,77.83 38.73,73.03 v38.73,71.12
  Bottom 0.406: P5.3 P5.2 P4.2 P4.3 | v45.72,52.7 v45.72,50.16 | v38.73,71.12 42.55,67.31 42.55,64.77 38.73,60.96 v38.73,57.15
KEY0^
  Top 0.254: U25.8 98.42,20.32 99.06,20.95 99.06,22.23 100.33,23.5 109.86,23.5 120.65,34.29 159.38,34.29 165.1,28.57 170.18,28.57 P9.18
KEY1^
  Top 0.254: U25.10 98.42,17.78 99.69,19.05 99.69,21.59 100.97,22.86 110.49,22.86 120.65,33.02 158.75,33.02 164.47,27.3 P9.17
KEY2^  (via drill 0.38)
  Top 0.254: U25.12 98.42,15.24 100.33,17.14 100.33,20.95 101.6,22.23 111.12,22.23 120.65,31.75 157.48,31.75 163.19,26.04 v167,26.04 | v167,31.11 170.18,31.11 P9.16
  Bottom 0.254: v167,26.04 v167,31.11
KEY3^  (via drill 0.38)
  Top 0.254: U25.2 104.14,13.97 106.05,12.06 108.58,12.06 111.12,14.61 111.12,16.51 122.56,27.94 v140.34,27.94 | v140.34,35.56 160.02,35.56 165.74,29.84 P9.15
  Bottom 0.254: v140.34,27.94 v140.34,35.56
MODE-KEY^
  Top 0.254: U25.4 104.14,16.51 105.41,17.78 105.41,19.68 106.05,20.32 110.49,20.32 120.65,30.48 156.84,30.48 162.56,24.77 P9.19
MODE-LED^  (via drill 0.38)
  Top 0.254: R61.1 165.1,66.67 170.18,61.59 v170.18,46.35 | P9.20 v170.18,26.04
  Bottom 0.254: v170.18,26.04 v170.18,46.35
N$1
  Top 0.254: IC1.2 155.23,97.19 154.94,97.47 154.94,98.42 154.62,98.74 152.4,98.74 | 152.4,98.74 152.4,97.92 R3.1 | 152.4,98.74 152.4,99.57 R1.2
N$2
  Top 0.254: K1.4 K1.1 18.91,8.26 19.05,8.26 20.32,9.53 22.73,9.53 R147.2 R148.1
N$8
  Top 0.254: R148.2 C116.2 30.35,8.13 34.29,12.06 88.27,12.06 95.25,19.05 U25.9
N$10
  Top 0.254: K2.4 K2.1 39.23,8.26 39.37,8.26 40.64,9.53 43.05,9.53 R149.2 R150.1
N$11
  Top 0.254: R150.2 C117.2 48.13,8.13 51.44,11.43 88.9,11.43 93.98,16.51 U25.11
N$20
  Top 0.254: LED8.C R61.2
N$21
  Top 0.254: K3.4 K3.1 59.65,8.21 60.96,9.53 63.37,9.53 R151.2 R152.2
N$23
  Top 0.254: R152.1 C118.2 71.63,8.13 74.3,10.79 89.53,10.79 92.71,13.97 U25.13
N$27
  Top 0.254: K4.4 K4.1 79.88,8.26 80.01,8.26 81.28,9.53 83.69,9.53 R153.2 R154.2
N$30
  Top 0.254: R154.1 C119.2 89.41,8.13 94.61,13.34 99.69,13.34 100.33,12.7 U25.1
N$33
  Top 0.406: C45.+ 19.05,69.85 20.95,71.75 25.11,71.75 P3.6
N$34
  Top 0.406: J16.4 97.58,71.55 96.52,70.48 D3.A
N$37
  Top 0.254: R64.2 110.62,66.8 109.22,65.41 D4.C
N$39
  Top 0.254: R62.2 97.92,66.8 96.52,65.41 D3.C
N$40
  Top 0.254: R66.2 123.32,66.8 121.92,65.41 D5.C
N$41
  Top 0.406: C46.+ 22.86,67.31 26.67,71.12 26.67,72.36 P3.5
N$42
  Top 0.406: J17.4 110.28,71.55 109.22,70.48 D4.A
N$43  (via drill 0.38)
  Top 0.254: v127.64,29.21 120.65,29.21 109.98,18.54 R136.2 R135.2 | KM.4 KM.1 155.12,69.39 133.99,48.26 130.81,48.26 v128.91,46.35
  Bottom 0.254: v128.91,46.35 128.91,30.48 v127.64,29.21
N$46
  Top 0.254: R68.2 136.02,66.8 134.62,65.41 D6.C
N$47  (via drill 0.38)
  Top 0.406: C100.- 5.71,36.83 1.59,40.96 1.59,53.02 6.35,57.78 v6.35,60.33 | P3.1 18.97,81.83 v17.78,80.64
  Bottom 0.406: v17.78,80.64 12.06,74.93 12.06,66.04 v6.35,60.33
N$48
  Top 0.406: J18.4 122.98,71.55 121.92,70.48 D5.A
N$49
  Top 0.254: U25.3 107.95,15.24 | R136.1 108.58,15.88 107.95,15.24 | 107.95,15.24 107.95,14.1 C112.2
N$51
  Top 0.406: IC11.5 12.7,40.64 12.06,40.01 12.06,38.73 12.7,38.1 C101.+
N$52
  Top 0.406: J19.4 135.69,71.55 134.62,70.48 D6.A
N$56
  Top 0.254: IC1.1 156.25,97.83 156.53,98.11 156.53,98.42 155.26,99.69 R1.1 153.8,100.52 153.35,100.97 130.18,100.97 126.36,97.16 J14.4
N$58
  Top 0.254: U21.7 84.81,33.62 85.09,33.34 87.95,33.34 89.22,34.61 U22.1 90.49,34.61 90.81,34.92 90.81,37.47 90.17,38.1 C95.2 R115.2
N$89
  Top 0.406: IC11.7 14.61,43.18 15.24,43.81 15.75,43.81 C88.2 R104.2 C75.+
N$90
  Top 0.406: IC11.6 14.61,41.91 14.92,42.23 15.68,42.23 C88.1 R104.1 17.78,40.51 R113.2
N$91  (via drill 0.38)
  Top 0.406: C101.- 16.51,36.83 20.32,40.64 20.32,50.8 v15.88,55.24 | P3.4 14.88,75.83 v13.34,74.3
  Bottom 0.406: v13.34,74.3 13.34,63.5 15.88,60.96 v15.88,55.24
N$93
  Top 0.406: IC11.3 9.53,41.91 10.48,40.96 10.48,38.42 C100.+
N$102
  Top 0.406: IC11.1 5.84,44.45 R101.2 | C87.2 R101.2 | R101.2 C74.+
N$103
  Top 0.406: IC11.2 5.84,43.18 R101.1 | C87.1 R101.1 | R114.2 R101.1
N$116
  Top 0.254: U21.11 84.16,42.25 85.09,43.18 87.63,43.18 104.14,59.69 113.03,59.69 114.3,60.96 114.3,62.06 U12.3 114.3,62.23 114.94,62.87 C48.1 R65.1 R64.1
N$117
  Top 0.254: U21.10 84.81,41.63 85.72,42.55 88.27,42.55 104.14,58.42 124.46,58.42 127,60.96 127,62.06 U13.3 127,62.23 127.64,62.87 C49.1 R67.1 R66.1
N$118
  Top 0.254: U21.9 85.46,41.01 86.36,41.91 88.9,41.91 104.14,57.15 135.89,57.15 139.7,60.96 139.7,62.06 U14.3 140.34,63.03 C50.1 R69.1 R68.1
N$119
  Top 0.254: U21.12 83.51,42.87 84.45,43.81 87,43.81 101.6,58.42 101.6,62.06 U11.3 101.6,62.23 102.23,62.87 C47.1 R63.1 R62.1
N$132
  Top 0.254: IC1.6 155.23,94.58 154.94,94.3 154.94,93.34 154.62,93.03 152.4,93.03 | 152.4,93.03 152.4,93.85 R8.1 | 152.4,93.03 152.4,92.2 R11.2
N$135
  Top 0.254: IC1.9 162.27,94.58 162.88,93.98 165.1,93.98 | 165.1,93.98 165.1,92.84 R10.2 | 165.1,93.98 165.1,94.81 R6.1
N$136
  Top 0.254: 161.58,97.19 IC1.13 162.27,97.19 162.88,97.79 165.1,97.79 | R4.1 165.1,96.97 165.1,97.79 | 165.1,97.79 165.1,98.61 R2.2
N$137
  Top 0.254: IC1.8 161.97,93.94 162.88,93.03 R10.1 163.83,92.9 163.83,92.39 164.47,91.76 166.05,91.76 166.69,92.39 166.69,100.01 163.19,103.5 107.31,103.5 100.89,97.08 J12.4
N$138
  Top 0.254: R2.1 162.88,98.74 161.97,97.83 IC1.14 159.97,97.83 155.57,102.23 118.75,102.23 113.67,97.16 J13.4
N$139
  Top 0.254: IC1.7 156.25,93.94 156.53,93.66 156.53,93.34 155.26,92.08 R11.1 153.67,91.95 153.67,91.12 153.35,90.81 148.59,90.81 142.24,97.16 138.72,97.16 J15.4
N$149  (via drill 0.38)
  Top 0.406: v9.53,73.03 C43.1
  Bottom 0.406: P2.5 8.71,73.83 v9.53,73.03
N$151  (via drill 0.38)
  Top 0.406: v10.79,71.12 11.43,70.48 C44.1
  Bottom 0.406: P2.6 10.08,71.83 v10.79,71.12
N$152
  Top 0.254: IC13.3 17.14,27.3 17.78,26.67 18.41,26.67 | R128.2 18.41,26.67 | R133.1 18.41,26.67 | C109.2 19.81,25.91 19.05,26.67 18.41,26.67
N$153
  Top 0.406: IC6.3 40.77,57.78 R77.2
N$158  (via drill 0.38)
  Top 0.406: v41.91,62.23 41.91,60.96 42.55,60.33 IC6.1
  Bottom 0.406: v41.91,62.23 43.81,64.14 43.81,68.58 45.52,70.28 P4.6
N$159
  Top 0.406: IC6.5 48.9,56.52 C63.-
N$162
  Top 0.406: U19.1 48.26,40.01 47.62,40.64 D8.A 43.81,40.64 42.55,39.37 D11.C 43.69,35.69 R120.1
N$163
  Top 0.254: IC13.5 9.53,28.57 8.89,27.94 8.38,27.94 R127.2 8.26,26.67 | R132.1 8.26,26.67 | C108.2 6.86,25.91 7.62,26.67 8.26,26.67
N$164
  Top 0.406: IC6.2 41.27,59.05 C57.+
N$165  (via drill 0.38)
  Top 0.406: P4.1 45.8,81.83 48.9,78.74 v48.9,77.47 | v48.9,67.94 53.98,62.87 53.98,55.24 52.7,53.98 C63.+
  Bottom 0.406: v48.9,67.94 v48.9,77.47
N$166
  Top 0.406: D8.C 47.12,44.45 R106.2
N$167  (via drill 0.38)
  Top 0.406: U19.6 v55.88,37.47 | v48.9,41.27 48.9,42.55 | 48.9,42.55 48.9,43.18 C83.+ 50.16,46.48 R94.1 50.8,47.12 50.8,47.62 51.44,48.26 52.7,48.26 v55.24,50.8 | R106.1 48.77,42.42 48.9,42.55 | R57.1 53.98,64.77 55.24,63.5 v55.24,55.88
  Bottom 0.406: v55.88,37.47 52.7,37.47 v48.9,41.27 | v55.24,55.88 v55.24,50.8
N$168
  Top 0.406: LED10.A U19.2 50.16,38.73 50.8,39.37 50.8,41.78 R109.1
N$169
  Top 0.406: IC7.3 61.09,57.78 R78.2
N$171
  Top 0.406: J10._2 11.47,92.11 10.79,91.44 R12.2
N$172  (via drill 0.38)
  Top 0.406: v65.83,66.47 64.56,66.47 62.23,64.14 62.23,60.96 62.87,60.33 IC7.1
  Bottom 0.406: v65.83,66.47 P5.6
N$173
  Top 0.406: R57.2 55.27,67.44 LED4.A
N$174
  Top 0.406: R58.2 57.76,67.44 LED5.A
N$175  (via drill 0.38)
  Top 0.406: v10.16,89.53 R14.2
  Bottom 0.406: J10._1 13.93,97.11 10.16,93.34 v10.16,89.53
N$176
  Top 0.406: J10.2 16.47,92.11 15.24,93.34 R9.2
N$177
  Top 0.406: J10.1 16.47,97.11 15.24,95.89 11.43,95.89 10.79,95.25 R5.2
N$178  (via drill 0.38)
  Top 0.406: R58.1 59.05,64.77 56.52,62.23 v56.52,57.15 | v56.52,52.07 56.52,43.81 57.15,43.18 57.15,40.64 55.24,38.73 U19.7
  Bottom 0.406: v56.52,57.15 v56.52,52.07
N$179
  Top 0.406: R122.2 R123.1 53.85,36.01 U19.5
N$180
  Top 0.406: IC7.5 69.22,56.52 C64.-
N$181
  Top 0.406: IC7.2 61.59,59.05 C58.+
N$182
  Top 0.406: P5.1 66.12,81.83 71.75,76.2 71.75,66.04 74.3,63.5 74.3,56.52 C64.+
N$184
  Top 0.406: U20.1 64.77,40.01 64.14,40.64 D9.A 60.33,40.64 59.05,39.37 D12.C 60.2,35.69 R121.1
N$185
  Top 0.406: D9.C 63.63,44.45 R107.2
N$186  (via drill 0.38)
  Top 0.406: U20.6 v72.39,37.47 | v65.41,41.27 65.41,42.55 | 65.41,42.55 65.41,43.18 C84.+ 66.67,46.48 R95.1 67.31,47.12 67.31,47.62 67.94,48.26 70.48,48.26 76.83,54.61 76.83,62.23 74.3,64.77 R59.1 | R107.1 65.28,42.42 65.41,42.55
  Bottom 0.406: v72.39,37.47 69.22,37.47 v65.41,41.27
N$187
  Top 0.406: LED11.A U20.2 66.67,38.73 67.31,39.37 67.31,41.78 R110.1
N$188
  Top 0.406: R59.2 75.59,67.44 LED6.A
N$189
  Top 0.406: R60.2 78.08,67.44 LED7.A
N$190
  Top 0.406: R60.1 79.38,55.88 74.3,50.8 74.3,40.64 72.39,38.73 U20.7
N$191
  Top 0.406: R124.2 R125.1 70.36,36.01 U20.5
N$195  (via drill 0.38)
  Top 0.406: U18.3 30.48,37.47 D10.A 28.7,35.69 R119.2 28.57,34.8 28.57,34.29 27.94,33.66 26.04,33.66 24.13,35.56 v24.13,40.64 | R87.1 R88.1 v24.13,44.45
  Bottom 0.406: v24.13,44.45 v24.13,40.64
N$196
  Top 0.406: U18.1 31.75,40.01 31.11,40.64 D7.A 27.3,40.64 26.04,39.37 D10.C 27.18,35.69 R119.1
N$197
  Top 0.406: D7.C 30.61,44.45 R105.2
N$198  (via drill 0.38)
  Top 0.406: R105.1 31.62,42.42 C82.+ 33.66,46.48 R93.1 32.38,48.77 v32.38,48.9 | R56.1 32.89,65.91 v32.38,65.41 | v32.38,61.59 v32.38,52.7
  Bottom 0.406: v32.38,65.41 v32.38,61.59 | v32.38,52.7 v32.38,48.9
N$199
  Top 0.406: LED9.A U18.2 33.66,38.73 34.29,39.37 34.29,41.78 R108.1
N$200
  Top 0.406: R56.2 35.91,67.44 LED3.A
OLED-DC^  (via drill 0.38)
  Top 0.254: v121.28,24.13 140.97,24.13 142.24,25.4 155.57,25.4 158.75,22.23 P9.21 | v114.94,30.48 97.79,30.48 90.17,22.86 79.38,22.86 75.56,19.05 33.02,19.05 29.84,15.88 JP1.4
  Bottom 0.254: v121.28,24.13 v114.94,30.48
OLED-RES^  (via drill 0.38)
  Top 0.254: v120.02,22.86 140.97,22.86 142.24,24.13 155.57,24.13 158.75,20.95 170.18,20.95 P9.22 | v113.67,29.21 97.79,29.21 90.81,22.23 80.01,22.23 76.2,18.41 62.87,18.41 60.33,15.88 JP1.16
  Bottom 0.254: v120.02,22.86 v113.67,29.21
OUT1L-J^  (via drill 0.38)
  Top 0.406: C75.- 15.24,49.02 R86.2 15.75,49.72 15.88,49.85 15.88,50.8 v13.97,52.7 | R87.2 22.23,51.44 v20.95,52.7
  Bottom 0.406: P7.2 8.26,59.05 8.26,54.61 10.16,52.7 v13.97,52.7 v20.95,52.7
OUT1L^
  Top 0.406: C43.2 13.34,62.74 13.34,59.05 P7.5 16.19,56.2 17.78,56.2 18.41,56.83 18.41,60.96 C46.-
OUT1R-J^  (via drill 0.38)
  Top 0.406: C74.- 3.17,49.02 R85.2 3.81,49.53 3.81,50.8 8.89,55.88 v10.16,55.88 | R88.2 24.13,51.44 v21.59,53.98
  Bottom 0.406: P7.4 10.79,59.05 10.79,56.52 v10.16,55.88 10.16,54.61 10.79,53.98 v21.59,53.98
OUT1R^
  Top 0.406: P7.7 15.88,59.05 15.88,62.1 | 15.88,62.1 C44.2 | C45.- 18.54,64.77 15.88,62.1
OUT-VREF  (via drill 0.38)
  Top 0.254: IC13.7 IC13.6
  Top 0.406: IC13.6 12.06,27.3 12.7,27.94 12.7,31.75 10.79,33.66 | P3.3 P3.2 9.7,79.83 6.35,83.19 4.13,83.19 3.49,82.55 3.49,80.96 4.62,79.83 P2.2 P2.3 4.81,77.83 3.17,76.2 3.17,71.12 6.35,67.94 6.35,62.23 0.95,57.15 0.95,39.05 6.35,33.66 10.79,33.66 | R113.1 16.07,40.2 14.92,39.05 v13.02,39.05 | v8.57,39.05 5.91,39.05 R114.1 | v10.79,36.83 10.79,33.66
  Bottom 0.406: v13.02,39.05 v10.79,36.83 v8.57,39.05
SPI1-CS0^  (via drill 0.38)
  Top 0.254: v118.75,21.59 140.97,21.59 142.24,22.86 155.57,22.86 158.75,19.68 P9.23 | v112.39,27.94 97.79,27.94 91.44,21.59 80.64,21.59 76.83,17.78 64.77,17.78 62.87,15.88 JP1.17
  Bottom 0.254: v118.75,21.59 v112.39,27.94
SPI1-CS1^  (via drill 0.38)
  Top 0.254: U21.3 82.21,28.87 83.14,27.94 88.9,27.94 93.98,33.02 v117.47,33.02 | v123.83,26.67 140.97,26.67 142.24,27.94 156.84,27.94 v161.29,23.5 | v163.83,17.14 167,17.14 168.28,18.41 170.18,18.41 P9.24
  Bottom 0.254: v123.83,26.67 v117.47,33.02 | v161.29,23.5 163.83,20.95 v163.83,17.14
SPI1-MISO^  (via drill 0.38)
  Top 0.254: v122.56,25.4 140.97,25.4 142.24,26.67 155.57,26.67 158.75,23.5 v160.02,23.5 | v116.2,31.75 97.79,31.75 89.53,23.5 83.82,23.5 80.33,26.99 80.33,35.88 82.21,37.76 U21.14 | v161.29,18.41 163.83,15.88 170.18,15.88 P9.26
  Bottom 0.254: v122.56,25.4 v116.2,31.75 | v160.02,23.5 160.02,19.68 v161.29,18.41
SPI1-MOSI^  (via drill 0.38)
  Top 0.254: U21.2 81.56,28.3 83.19,26.67 v85.72,26.67 | v117.47,20.32 140.97,20.32 142.24,21.59 155.57,21.59 162.56,14.61 P9.27 | v111.12,26.67 97.79,26.67 91.44,20.32 v87,20.32 85.09,20.32 78.11,13.34 41.27,13.34 40.01,14.61 JP1.8
  Bottom 0.254: v117.47,20.32 v111.12,26.67 | v85.72,26.67 87,25.4 v87,20.32
SPI1-SCK^  (via drill 0.38)
  Top 0.254: U21.1 80.91,27.68 83.82,24.77 v85.72,24.77 | v116.2,19.05 140.97,19.05 142.24,20.32 155.57,20.32 162.56,13.34 170.18,13.34 P9.28 | v109.86,25.4 97.79,25.4 91.44,19.05 v85.72,19.05 79.38,12.7 39.37,12.7 37.47,14.61 JP1.7
  Bottom 0.254: v116.2,19.05 v109.86,25.4 | v85.72,24.77 v85.72,19.05
(copper drawn outside any net)
  shapes: Top area x1

## Text on the board
tPlace: aleph/int | 130507